# Altium PCB 底板20160428.PcbDoc (part 1 of 5)
Units mm, origin at the board's own origin, x right, y up, seen from the top; angles counter-clockwise.
Board outline 123.5 x 102.51 mm, 2 copper layers (Top Layer, Bottom Layer); 219 components, 217 nets, 791 pads, 260 vias.
Unrouted connection lines stored in the file: 1.
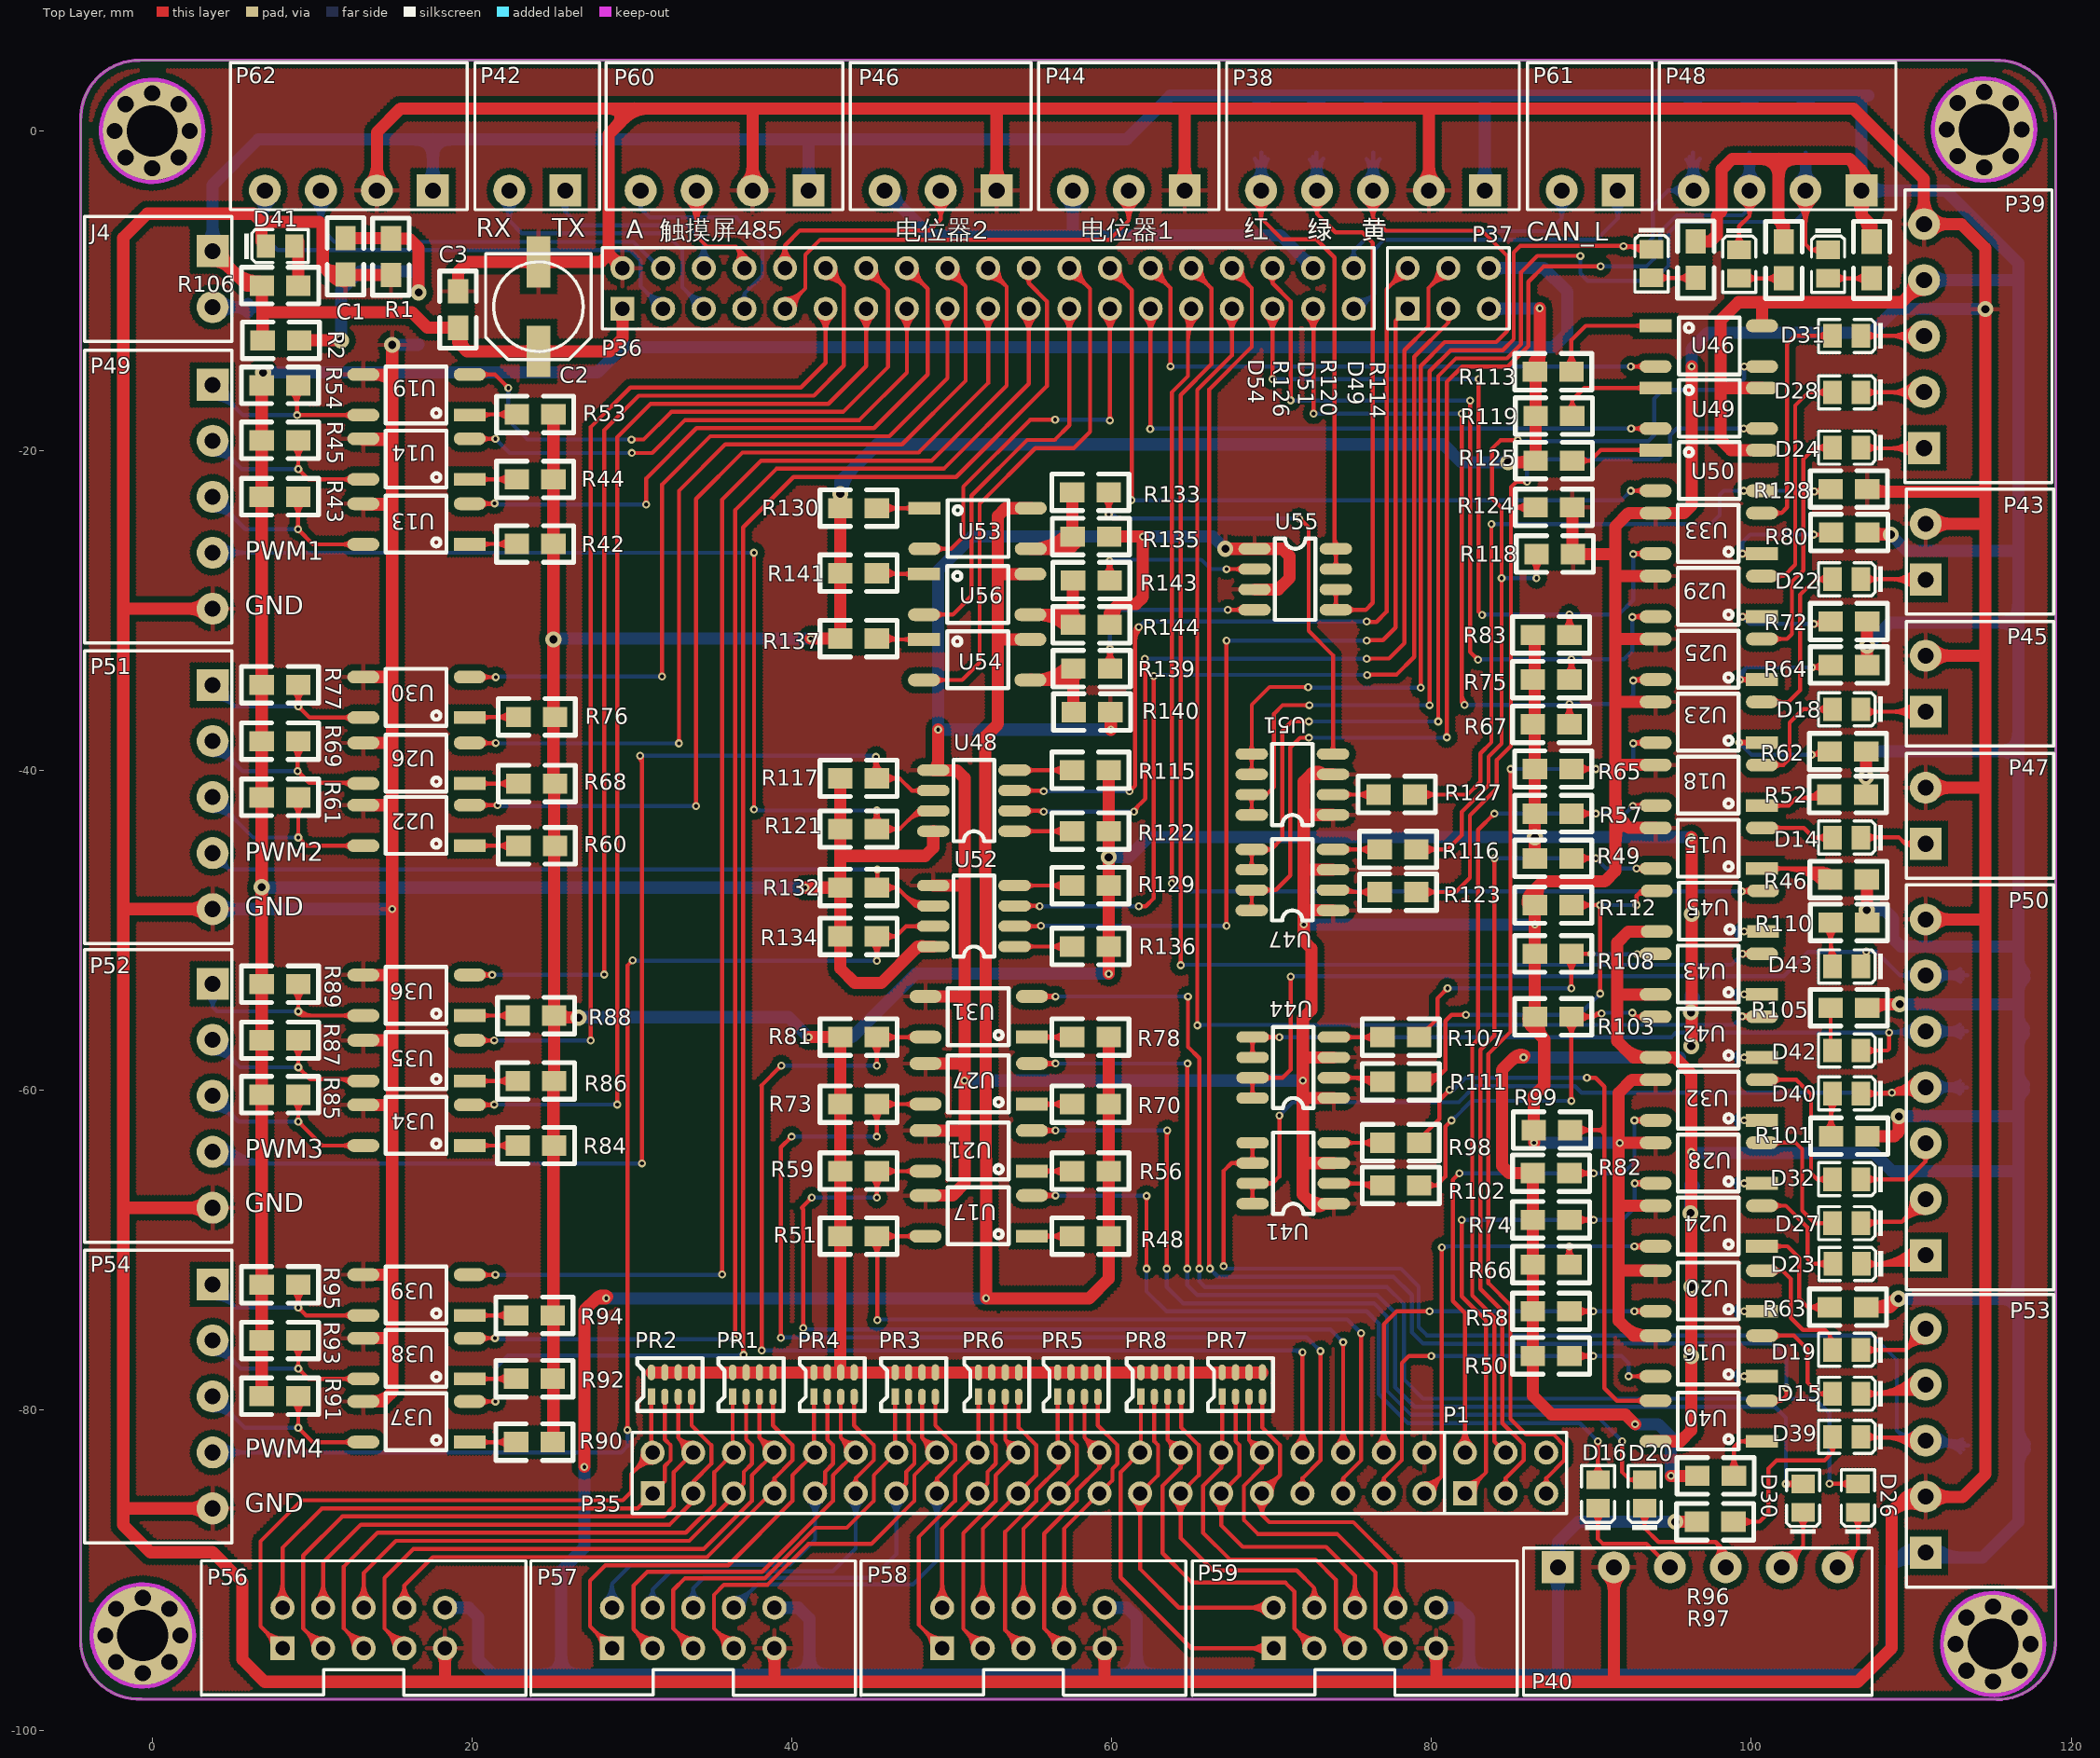
[diagram p0: Top Layer view]
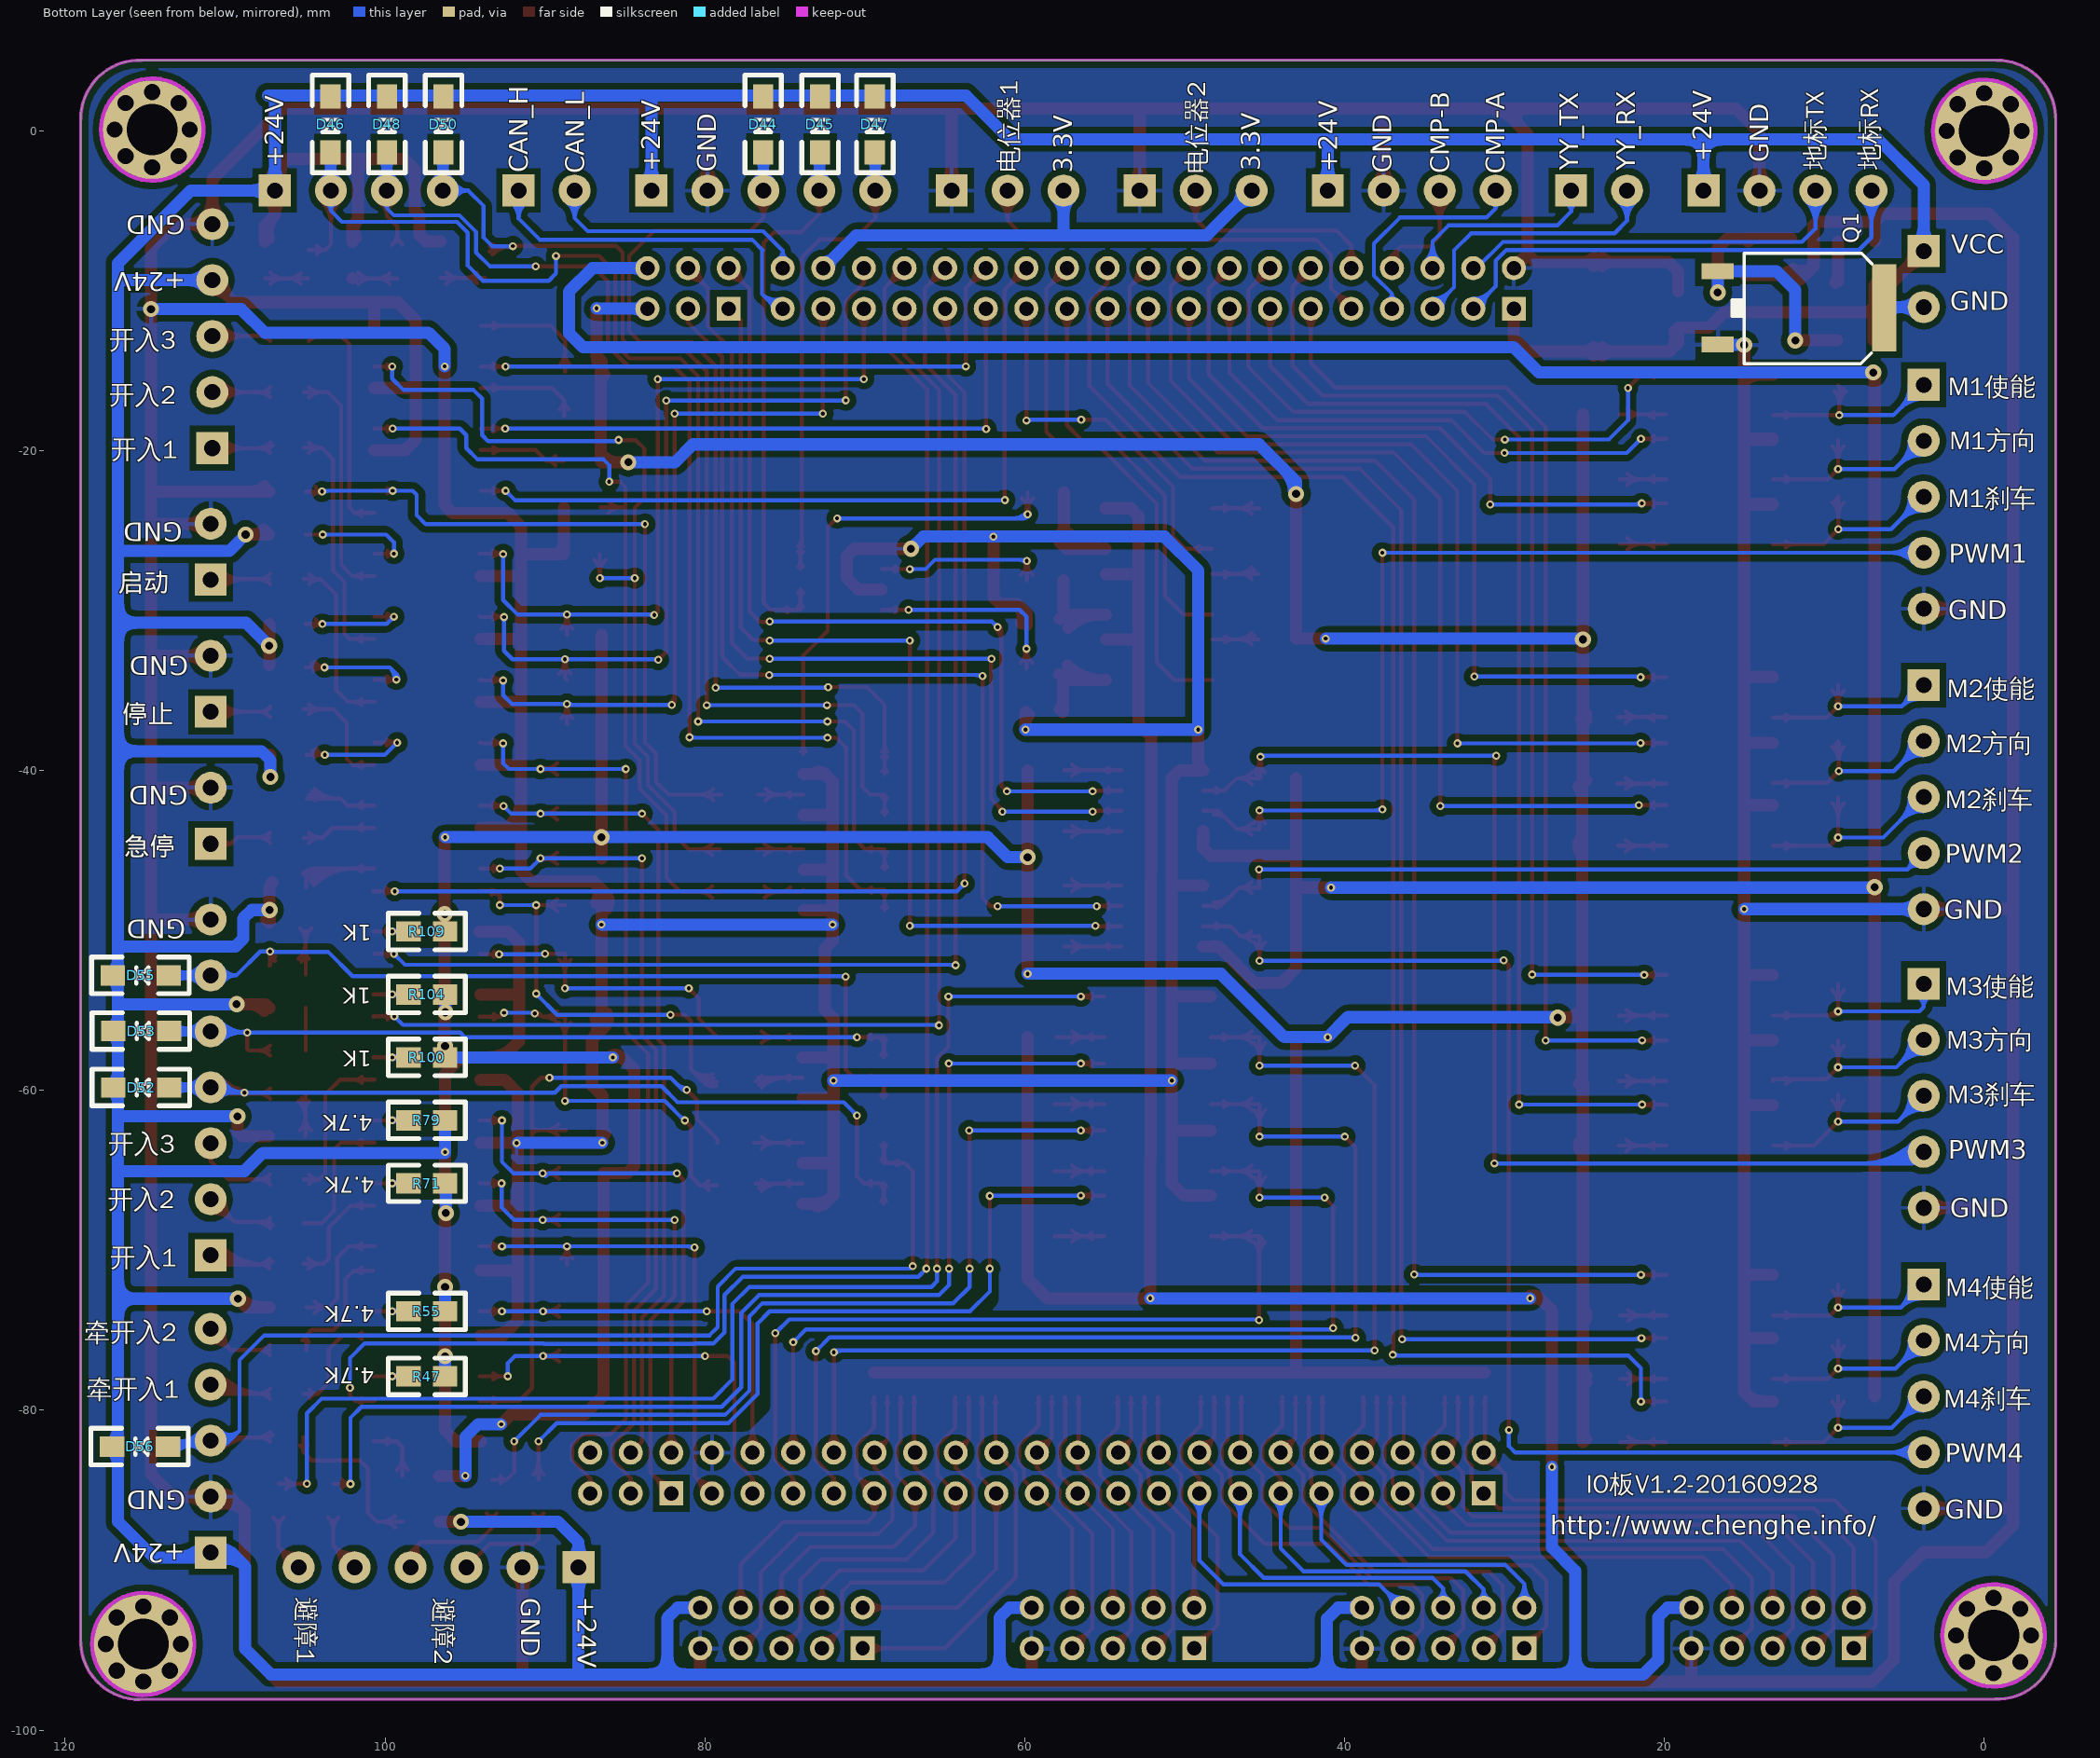
[diagram p1: Bottom Layer view, seen from below]

## Layer stack, top to bottom
Top Layer: signal copper 0.0356
Dielectric: dielectric 0.32, FR-4, Dk 4.8
Bottom Layer: signal copper 0.0356

## Board outline
-4.47,-94.389 -4.47,0.61 cw(c-0.792,0.731) -0.792,4.412 -0.792,4.42 115.222,4.42 115.222,4.415 cw(c115.344,0.737) 119.024,0.737 119.03,0.737 119.03,-94.285 cw(c115.351,-94.406) 115.351,-98.087 115.351,-98.08 -0.669,-98.069 -0.669,-98.067 cw(c-0.79,-94.389)

## Design rules (kind name [scope] priority, off if disabled: settings)
Clearance [All] p1: gap=0.4
HoleToHoleClearance [All] p1: gap=0.152 allowstackedmicrovias=TRUE
MinimumSolderMaskSliver [All] p1: minsoldermaskwidth=0.051
PolygonConnect [All] p1: connectstyle=Relief reliefconductorwidth=0.254 reliefentries=4 polygonreliefangle="90 Angle"
RoutingVias [All] p1: holewidth=0.711 width=1.27 viastyle="Through Hole" minholewidth=0.711 minwidth=1.27 maxholewidth=0.711 maxwidth=1.27
SilkToSilkClearance [All] p1: silktosilkclearance=-1
SilkscreenOverComponentPads [IsPad] p1: minsilkscreentomaskgap=-1
SolderMaskExpansion [All] p1: expansion=0.102
Width [All] p1: maxlimit=1.27 minlimit=0.254 preferedwidth=0.254
24 further rules are at their usual default settings.

## Components (designator, comment, footprint, x,y, rotation, side; value= is the part's Value field where it differs from the comment)
C1 "0.1uF" 0805 12.09,-8.992 r90 top
C2 "220uF" CC6.56.5 24.155,-10.998 r90 top
C3 "0.1uF" 0805 19.126,-10.033 r270 top
D14 "LED0" LC-0805_LED_S1 105.08,-44.196 r180 top
D15 "LED0" LC-0805_LED_S1 105.08,-78.969 r180 top
D16 "LED0" LC-0805_LED_S1 90.405,-84.346 r90 top
D18 "LED0" LC-0805_LED_S1 105.08,-36.17 r180 top
D19 "LED0" LC-0805_LED_S1 105.08,-76.225 r180 top
D20 "LED0" LC-0805_LED_S1 93.326,-84.346 r90 top
D22 "LED0" LC-0805_LED_S1 105.08,-28.035 r180 top
D23 "LED0" LC-0805_LED_S1 105.105,-70.841 r180 top
D24 "LED0" LC-0805_LED_S1 105.08,-19.812 r180 top
D26 "LED0" LC-0805_LED_S1 103.232,-84.6 r90 top
D27 "LED0" LC-0805_LED_S1 105.08,-68.301 r180 top
D28 "LED0" LC-0805_LED_S1 105.08,-16.351 r180 top
D30 "LED0" LC-0805_LED_S1 106.661,-84.6 r90 top
D31 "LED0" LC-0805_LED_S1 105.08,-12.82 r180 top
D32 "LED0" LC-0805_LED_S1 105.08,-65.557 r180 top
D39 "LED0" LC-0805_LED_S1 105.08,-81.661 r180 top
D40 "LED0" LC-0805_LED_S1 105.08,-60.198 r180 top
D41 "LED0" LC-0805_LED_S1 8.89,-7.214 r0 top
D42 "LED0" LC-0805_LED_S1 105.08,-57.506 r180 top
D43 "LED0" LC-0805_LED_S1 105.08,-52.248 r180 top
D44 "" DIDOE 76.352,-1.346 r90 bottom
D45 "" DIDOE 72.796,-1.346 r90 bottom
D46 "" DIDOE 103.403,-1.346 r90 bottom
D47 "" DIDOE 69.367,-1.346 r90 bottom
D48 "" DIDOE 99.873,-1.346 r90 bottom
D49 "LED0" LC-0805_LED_S1 104.794,-9.228 r270 top
D50 "" DIDOE 96.342,-1.346 r90 bottom
D51 "LED0" LC-0805_LED_S1 99.231,-9.228 r270 top
D52 "" DIDOE 113.487,-59.817 r0 bottom
D53 "" DIDOE 113.487,-56.286 r0 bottom
D54 "LED0" LC-0805_LED_S1 93.751,-9.195 r270 top
D55 "" DIDOE 113.513,-52.807 r0 bottom
D56 "" DIDOE 113.563,-82.271 r0 bottom
J4 "CON2" DZ-2-3.5 3.785,-7.518 r270 top locked
P1 "Header 3X2H" HDR2X3 82.093,-85.192 r0 top locked
P35 "MHDR2X20" DIP-2X20 31.293,-85.192 r0 top locked
P36 "MHDR2X19" DIP-2X19 29.413,-11.125 r0 top locked
P37 "Header 3X2H" HDR2X3 78.511,-11.125 r0 top
P38 "三色灯" DZ-5-3.5 83.337,-3.734 r180 top
P39 "输入备用" DZ-5-3.5 110.795,-19.837 r90 top
P40 "蔽障" DZ-6-3.5 87.9,-89.814 r0 top
P42 "语音板通信" DZ-2-3.5 25.832,-3.734 r180 top
P43 "启动" DZ-2-3.5 110.896,-28.067 r90 top
P44 "电位器1" DZ-3-3.5 64.567,-3.734 r180 top
P45 "停止" DZ-2-3.5 110.896,-36.322 r90 top
P46 "电位器2" DZ-3-3.5 52.807,-3.734 r180 top
P47 "急停" DZ-2-3.5 110.896,-44.577 r90 top
P48 "三色灯" DZ-4-3.5 106.883,-3.734 r180 top
P49 "电机1" DZ-5-3.5 3.785,-15.883 r270 top
P50 "通讯IO" DZ-7-3.5 110.896,-70.307 r90 top
P51 "电机2" DZ-5-3.5 3.785,-34.662 r270 top
P52 "电机3" DZ-5-3.5 3.785,-53.339 r270 top
P53 "牵引杆" DZ-5-3.5 110.896,-88.9 r90 top
P54 "电机4" DZ-5-3.5 3.785,-72.136 r270 top
P56 "磁导航1" HDR2X5 8.153,-94.884 r0 top
P57 "磁导航2" HDR2X5 28.753,-94.884 r0 top locked
P58 "磁导航3" HDR2X5 49.403,-94.884 r0 top
P59 "磁导航4" HDR2X5 70.129,-94.884 r0 top
P60 "触摸屏RS485" DZ-4-3.5 41.046,-3.734 r180 top
P61 "应用板通讯" DZ-2-3.5 91.643,-3.734 r180 top
P62 "RFID_RS232" DZ-4-3.5 17.551,-3.734 r180 top
PR1 "PZ" SOP8 36.297,-79.019 r90 top
PR2 "PZ" SOP8 31.217,-79.019 r90 top
PR3 "PZ" SOP8 46.457,-79.019 r90 top
PR4 "PZ" SOP8 41.377,-79.019 r90 top
PR5 "PZ" SOP8 56.617,-79.019 r90 top
PR6 "PZ" SOP8 51.664,-79.019 r90 top
PR7 "PZ" SOP8 66.904,-79.019 r90 top
PR8 "PZ" SOP8 61.824,-79.019 r90 top
Q1 "IRFR1205" TO-252AA 16.662,-8.788 r270 bottom
R1 "1k" 0805 14.935,-6.731 r270 top
R2 "2k" 0805 9.195,-13.106 r180 top
R42 "1K" 0805 22.809,-25.832 r0 top
R43 "4.7K" 0805 9.136,-22.879 r180 top
R44 "1K" 0805 22.809,-21.793 r0 top
R45 "4.7K" 0805 9.136,-19.355 r180 top
R46 "4.7K" 0805 104.927,-46.812 r0 top
R47 "4.7K" 0805 98.527,-77.876 r180 bottom
R48 "4.7K" 0805 57.531,-69.113 r0 top
R49 "1K" 0805 88.748,-45.491 r180 top
R50 "1K" 0805 88.621,-76.606 r180 top
R51 "1K" 0805 45.314,-69.113 r180 top
R52 "4.7K" 0805 104.877,-41.504 r0 top
R53 "1K" 0805 22.809,-17.729 r0 top
R54 "4.7K" 0805 9.136,-15.919 r180 top
R55 "4.7K" 0805 98.527,-73.812 r180 bottom
R56 "4.7K" 0805 57.531,-65.049 r0 top
R57 "1K" 0805 88.748,-42.697 r180 top
R58 "1K" 0805 88.621,-73.812 r180 top
R59 "1K" 0805 45.314,-65.049 r180 top
R60 "1K" 0805 22.911,-44.704 r0 top
R61 "4.7K" 0805 9.136,-41.675 r180 top
R62 "4.7K" 0805 104.902,-38.811 r0 top
R63 "4.7K" 0805 104.902,-73.558 r0 top
R64 "4.7K" 0805 104.953,-33.401 r0 top
R65 "1K" 0805 88.748,-39.903 r180 top
R66 "1K" 0805 88.621,-70.891 r180 top
R67 "1K" 0805 88.621,-37.109 r180 top
R68 "1K" 0805 22.911,-40.818 r0 top
R69 "4.7K" 0805 9.136,-38.169 r180 top
R70 "4.7K" 0805 57.531,-60.858 r0 top
R71 "4.7K" 0805 98.527,-65.811 r180 bottom
R72 "4.7K" 0805 104.953,-30.683 r0 top
R73 "1K" 0805 45.314,-60.858 r180 top
R74 "1K" 0805 88.621,-68.097 r180 top
R75 "1K" 0805 88.621,-34.315 r180 top
R76 "1K" 0805 22.911,-36.652 r0 top
R77 "4.7K" 0805 9.136,-34.639 r180 top
R78 "4.7K" 0805 57.531,-56.667 r0 top
R79 "4.7K" 0805 98.527,-61.874 r180 bottom
R80 "4.7K" 0805 104.978,-25.121 r0 top
R81 "1K" 0805 45.314,-56.667 r180 top
R82 "1K" 0805 88.621,-65.176 r180 top
R83 "1K" 0805 88.621,-31.521 r180 top
R84 "1K" 0805 22.86,-63.449 r0 top
R85 "4.7K" 0805 9.136,-60.267 r180 top
R86 "1K" 0805 22.86,-59.411 r0 top
R87 "4.7K" 0805 9.136,-56.864 r180 top
R88 "1K" 0805 22.86,-55.321 r0 top
R89 "4.7K" 0805 9.136,-53.359 r180 top
R90 "1K" 0805 22.758,-81.991 r0 top
R91 "4.7K" 0805 9.136,-79.114 r180 top
R92 "1K" 0805 22.758,-78.029 r0 top
R93 "4.7K" 0805 9.136,-75.634 r180 top
R94 "1K" 0805 22.758,-74.066 r0 top
R95 "4.7K" 0805 9.136,-72.155 r180 top
R96 "1K" 0805 98.908,-84.099 r180 top
R97 "4.7K" 0805 96.596,-86.97 r0 top
R98 "1K" 0805 76.937,-63.271 r0 top
R99 "4.7K" 0805 86.385,-62.484 r0 top
R100 "1K" 0805 98.527,-57.937 r180 bottom
R101 "4.7K" 0805 104.978,-62.865 r0 top
R102 "1K" 0805 76.937,-65.938 r0 top
R103 "4.7K" 0805 86.462,-55.397 r0 top
R104 "1K" 0805 98.527,-54 r180 bottom
R105 "4.7K" 0805 107.239,-54.839 r180 top
R106 "4.7K" 0805 6.858,-9.677 r0 top
R107 "1K" 0805 76.937,-56.667 r0 top
R108 "4.7K" 0805 86.462,-51.46 r0 top
R109 "1K" 0805 98.527,-50.063 r180 bottom
R110 "4.7K" 0805 104.953,-49.505 r0 top
R111 "1K" 0805 76.937,-59.461 r0 top
R112 "4.7K" 0805 86.462,-48.412 r0 top
R113 "1K" 0805 88.748,-15.062 r180 top
R114 "4.7K" 0805 107.518,-6.934 r270 top
R115 "330R" 0805 57.531,-39.98 r0 top
R116 "1K" 0805 76.759,-44.933 r0 top
R117 "2K" 0805 45.314,-40.488 r180 top
R118 "4.7K" 0805 88.849,-26.467 r180 top
R119 "1K" 0805 88.798,-17.831 r180 top
R120 "4.7K" 0805 102.032,-9.22 r90 top
R121 "2K" 0805 43.028,-43.663 r0 top
R122 "330R" 0805 57.531,-43.79 r0 top
R123 "1K" 0805 76.759,-47.6 r0 top
R124 "4.7K" 0805 88.798,-23.546 r180 top
R125 "1K" 0805 88.798,-20.625 r180 top
R126 "4.7K" 0805 96.52,-9.195 r90 top
R127 "1K" 0805 76.683,-41.504 r0 top
R128 "4.7K" 0805 107.239,-22.403 r180 top
R129 "330R" 0805 57.531,-47.193 r0 top
R130 "1K" 0805 45.314,-23.597 r180 top
R132 "2K" 0805 45.314,-47.32 r180 top
R133 "1K" 0805 59.817,-22.606 r180 top
R134 "2K" 0805 43.028,-50.368 r0 top
R135 "4.7K" 0805 59.842,-25.375 r180 top
R136 "330R" 0805 57.531,-51.003 r0 top
R137 "1K" 0805 45.314,-31.75 r180 top
R139 "1K" 0805 59.893,-33.63 r180 top
R140 "4.7K" 0805 59.919,-36.347 r180 top
R141 "1K" 0805 45.314,-27.661 r180 top
R143 "1K" 0805 59.868,-28.118 r180 top
R144 "4.7K" 0805 59.868,-30.886 r180 top
U13 "TLP185" TLP127 20.447,-25.857 r180 top
U14 "TLP185" TLP127 20.447,-21.793 r180 top
U15 "TLP185" TLP127 101.249,-46.126 r180 top
U16 "TLP185" TLP127 101.249,-77.876 r180 top
U17 "TLP185" TLP127 55.601,-69.113 r180 top
U18 "TLP185" TLP127 101.249,-42.189 r180 top
U19 "TLP185" TLP127 20.447,-17.78 r180 top
U20 "TLP185" TLP127 101.249,-73.812 r180 top
U21 "TLP185" TLP127 55.601,-65.049 r180 top
U22 "TLP185" TLP127 20.447,-44.704 r180 top
U23 "TLP185" TLP127 101.249,-38.252 r180 top
U24 "TLP185" TLP127 101.249,-69.748 r180 top
U25 "TLP185" TLP127 101.249,-34.315 r180 top
U26 "TLP185" TLP127 20.447,-40.811 r180 top
U27 "TLP185" TLP127 55.601,-60.858 r180 top
U28 "TLP185" TLP127 101.249,-65.811 r180 top
U29 "TLP185" TLP127 101.249,-30.378 r180 top
U30 "TLP185" TLP127 20.447,-36.691 r180 top
U31 "TLP185" TLP127 55.601,-56.667 r180 top
U32 "TLP185" TLP127 101.249,-61.874 r180 top
U33 "TLP185" TLP127 101.249,-26.441 r180 top
U34 "TLP185" TLP127 20.447,-63.449 r180 top
U35 "TLP185" TLP127 20.447,-59.411 r180 top
U36 "TLP185" TLP127 20.447,-55.321 r180 top
U37 "TLP185" TLP127 20.447,-81.991 r180 top
U38 "TLP185" TLP127 20.447,-78.033 r180 top
U39 "TLP185" TLP127 20.447,-74.066 r180 top
U40 "TLP185" TLP127 101.249,-81.94 r180 top
U41 "AF4920GW" SO-8 73.889,-67.081 r180 top
U42 "TLP185" TLP127 101.249,-57.937 r180 top
U43 "TLP185" TLP127 101.249,-54 r180 top
U44 "AF4920GW" SO-8 73.889,-60.477 r180 top
U45 "TLP185" TLP127 101.321,-50.063 r180 top
U46 "TLP185" TLP127 93.421,-12.192 r0 top
U47 "AF4920GW" SO-8 73.838,-48.743 r180 top
U48 "HCPL0630" SO-8 53.924,-43.79 r180 top
U49 "TLP185" TLP127 93.421,-16.078 r0 top
U50 "TLP185" TLP127 93.421,-19.964 r0 top
U51 "AF4920GW" SO-8 73.838,-42.774 r180 top
U52 "HCPL0630" SO-8 53.924,-51.003 r180 top
U53 "TLP185" TLP127 47.701,-23.597 r0 top
U54 "TLP185" TLP127 47.676,-31.801 r0 top
U55 "AF4920GW" SO-8 68.936,-26.137 r0 top
U56 "TLP185" TLP127 47.676,-27.711 r0 top

## Footprints (in the part's own frame and the unit in brackets; to place one, negate y for a bottom-side part, rotate by r counter-clockwise, add the part's x,y. Pads: shape width x height; smd on the part's side, far side on the other; paste and mask are expansions set on the pad)
0805 [mil]
  rect 60x50 smd: 1(0,0) 2(90,0)
  silkscreen extent -50,-45 140,45
CC6.56.5 [mm]
  rect 3.2x1.5 smd: 1(-2.794,0) 2(2.8,0)
  silkscreen extent -3.3,-3.3 3.3,3.3
DIDOE [mil]
  rect 60x50 smd: 1(0,0) 2(137.8,0)
  silkscreen extent -50,-45 190,45
DIP-2X19 [mm]
  rect 1.5x1.5 hole 0.9: 1(0,0)
  round 1.5 hole 0.9: 2(0,2.54) 3(2.54,0) 4(2.54,2.54) 5(5.08,0) 6(5.08,2.54) 7(7.62,0) 8(7.62,2.54) 9(10.16,0) 10(10.16,2.54) 11(12.7,0) 12(12.7,2.54) 13(15.24,0) 14(15.24,2.54) 15(17.78,0) 16(17.78,2.54) 17(20.32,0) 18(20.32,2.54) 19(22.86,0) 20(22.86,2.54) 21(25.4,0) 22(25.4,2.54) 23(27.94,0) 24(27.94,2.54) 25(30.48,0) 26(30.48,2.54) 27(33.02,0) 28(33.02,2.54) 29(35.56,0) 30(35.56,2.54) 31(38.1,0) 32(38.1,2.54) 33(40.64,0) 34(40.64,2.54) 35(43.18,0) 36(43.18,2.54) 37(45.72,0) 38(45.72,2.54)
  silkscreen extent -1.27,-1.27 46.99,3.81
DIP-2X20 [mm]
  rect 1.5x1.5 hole 0.9: 1(0,0)
  round 1.5 hole 0.9: 2(0,2.54) 3(2.54,0) 4(2.54,2.54) 5(5.08,0) 6(5.08,2.54) 7(7.62,0) 8(7.62,2.54) 9(10.16,0) 10(10.16,2.54) 11(12.7,0) 12(12.7,2.54) 13(15.24,0) 14(15.24,2.54) 15(17.78,0) 16(17.78,2.54) 17(20.32,0) 18(20.32,2.54) 19(22.86,0) 20(22.86,2.54) 21(25.4,0) 22(25.4,2.54) 23(27.94,0) 24(27.94,2.54) 25(30.48,0) 26(30.48,2.54) 27(33.02,0) 28(33.02,2.54) 29(35.56,0) 30(35.56,2.54) 31(38.1,0) 32(38.1,2.54) 33(40.64,0) 34(40.64,2.54) 35(43.18,0) 36(43.18,2.54) 37(45.72,0) 38(45.72,2.54) 39(48.26,0) 40(48.26,2.54)
  silkscreen extent -1.27,-1.27 49.53,3.81
DZ-2-3.5 [mm]
  rect 2x2 hole 1: 1(0,0)
  round 2 hole 1: 2(3.5,0)
  silkscreen extent -2.15,-8 5.65,1.2
DZ-3-3.5 [mm]
  rect 2x2 hole 1: 1(0,0)
  round 2 hole 1: 2(3.5,0) 3(7,0)
  silkscreen extent -2.15,-8 9.15,1.2
DZ-4-3.5 [mm]
  rect 2x2 hole 1: 1(0,0)
  round 2 hole 1: 2(3.5,0) 3(7,0) 4(10.5,0)
  silkscreen extent -2.15,-8 12.65,1.2
DZ-5-3.5 [mm]
  rect 2x2 hole 1: 1(0,0)
  round 2 hole 1: 2(3.5,0) 3(7,0) 4(10.5,0) 5(14,0)
  silkscreen extent -2.15,-8 16.15,1.2
DZ-6-3.5 [mm]
  rect 2x2 hole 1: 1(0,0)
  round 2 hole 1: 2(3.5,0) 3(7,0) 4(10.5,0) 5(14,0) 6(17.5,0)
  silkscreen extent -2.15,-8 19.65,1.2
DZ-7-3.5 [mm]
  rect 2x2 hole 1: 1(0,0)
  round 2 hole 1: 2(3.5,0) 3(7,0) 4(10.5,0) 5(14,0) 6(17.5,0) 7(21,0)
  silkscreen extent -2.15,-8 23.15,1.2
HDR2X3 [mm]
  rect 1.5x1.5 hole 0.9: 1(0,0)
  round 1.5 hole 0.9: 2(0,2.54) 3(2.54,0) 4(2.54,2.54) 5(5.08,0) 6(5.08,2.54)
  silkscreen extent -1.27,-1.27 6.35,3.81
HDR2X5 [mm]
  rect 1.5x1.5 hole 0.9: 1(0,0)
  round 1.5 hole 0.9: 2(0,2.54) 3(2.54,0) 4(2.54,2.54) 5(5.08,0) 6(5.08,2.54) 7(7.62,0) 8(7.62,2.54) 9(10.16,0) 10(10.16,2.54)
  silkscreen extent -5.07,-2.93 15.23,5.47
LC-0805_LED_S1 [mm]
  rect 1.16x1.47 smd: A(0.001,0) K(-1.779,0)
  silkscreen extent -3.13,-1.04 0.88,1.03, body extent -1.9,-0.62 0.12,0.62, height 1.1
SO-8 [mil]
  oval 80x28 smd: 1(0,0) 2(0,-50) 3(0,-100) 4(0,-150) 5(200,-150) 6(200,-100) 7(200,-50) 8(200,0)
  silkscreen extent 50,-175 150,25
SOP8 [mil]
  rect 40x18 smd: 1(-5.35,-0.18)
  oval 40x18 smd: 2(-5.35,-33.18) 3(-5.35,-66.18) 4(-5.35,-99.18) 5(54.65,-99.18) 6(54.65,-66.18) 7(54.65,-33.18)
  oval 39x18 smd: 8(54.65,-0.18)
  silkscreen extent -40,-126 90,35
TLP127 [mm]
  rect 2x0.8 smd: 1(0.589,-0.001)
  oval 2x0.8 smd: 3(0.589,-2.541) 4(7.239,-2.541) 6(7.239,-0.001)
  silkscreen extent 2.04,-3.05 5.85,0.51
TO-252AA [mm]
  rect 1x2 smd: 1(0,0) 3(4.57,0)
  rect 5.46x1.5 smd: 2(2.286,10.414)
  silkscreen extent -1.12,0.89 5.77,9.65

## Part data
D44 D45 D46 D47 D48 D50 D52 D53 D55 D56: library part DIO
J4: "Co"
P1 P37: "Header, 3-Pin, Dual row, Rig"
P35: "Header, 20-Pin,"
P36: "Header, 19-Pin,"
P38 P39 P49 P51 P52 P53 P54: library part "Header 5", "Heade"
P40: library part He
P42 P43 P45 P47 P61: library part "Header 2", "Heade"
P44 P46: library part "Header 3", "Heade"
P48 P60 P62: library part "Header 4", "Heade"
P50: library part "Header 7", "Heade"
P56 P57 P58 P59: library part "Header 5X2H", "Header, 5-Pin, Dual row, Right Angl"
Q1: library part NMOS-2, "N-Channel Powe"
U48 U52: library part H

## Free pads (board coordinates)
  round 1 hole 1: 1(-2.934,-94.082) 1(-2.35,0) 1(-2.246,-95.743) 1(-2.246,-92.42) 1(-1.662,-1.662) 1(-1.662,1.662) 1(-0.584,-96.432) 1(-0.584,-91.732) 1(0,-2.35) 1(0,2.35) 1(1.078,-95.743) 1(1.078,-92.42) 1(1.662,-1.662) 1(1.662,1.662) 1(1.766,-94.082) 1(2.35,0) 1(112.204,0.076) 1(112.763,-94.615) 1(112.892,-1.586) 1(112.892,1.738) 1(113.451,-96.277) 1(113.451,-92.953) 1(114.554,-2.274) 1(114.554,2.426) 1(115.113,-96.965) 1(115.113,-92.265) 1(116.216,-1.586) 1(116.216,1.738) 1(116.775,-96.277) 1(116.775,-92.953) 1(116.904,0.076) 1(117.463,-94.615)
  round 6.2 hole 3.2: 1(-0.584,-94.082) 1(0,0) 1(114.554,0.076) 1(115.113,-94.615)

## Via types
v1: diameter 0.5, hole 0.25, Top Layer to Bottom Layer, 233 vias
v2: diameter 1, hole 0.5, Top Layer to Bottom Layer, 27 vias

## Nets (pads, with @x,y where several pads share a name; then routed paths per layer and width w, separated by ;. In a path a pad name is that pad's centre, name@x,y a point inside that pad or via, vN(x,y) a via of type N, cw(c..) or ccw(c..) an arc to the next point about the centre after c; other vN are vias at no path point)
BY_KC1: P36.25 U53.3 | length 30.3
  Top Layer w0.254: U53.3@48.29,-26.138 49.961,-26.138 50.724,-25.375 50.724,-22.25 54.915,-18.059 v1(56.464,-18.059) ; U53.3@49.083,-26.331 cw(c49.549,-26.797) 49.549,-26.138 cw(c49.549,-25.479) U53.3@49.083,-25.945 ; v1@56.377,-18.146 ccw(c56.167,-18.356) 56.167,-18.059 ccw(c56.167,-17.762) v1@56.377,-17.972 ; P36.25@59.453,-11.566 cw(c58.389,-12.629) 59.893,-12.629 cw(c61.397,-12.629) P36.25@60.334,-11.566 ; P36.25@59.632,-11.386 cw(c59.002,-12.016) 59.893,-12.016 cw(c60.784,-12.016) P36.25@60.154,-11.386 ; v1@59.806,-18.023 ccw(c59.596,-17.813) 59.893,-17.813 ccw(c60.19,-17.813) v1@59.98,-18.023 ; v1@59.893,-18.085 P36.25@59.893,-11.125
  Bottom Layer w0.254: v1(56.464,-18.059) 59.842,-18.059 v1(59.893,-18.11) ; v1@56.551,-18.146 cw(c56.761,-18.356) 56.761,-18.059 cw(c56.761,-17.762) v1@56.551,-17.972 ; 59.474,-18.059 cw(c59.474,-18.53) v1@59.806,-18.197
BY_KC2: P36.24 U54.3 | length 38.2
  Top Layer w0.254: U54.3@48.265,-34.342 50.647,-34.342 51.74,-33.249 51.74,-23.317 55.22,-19.837 57.633,-19.837 58.649,-18.821 58.649,-9.881 P36.24@57.353,-8.585 ; U54.3@49.058,-34.535 cw(c49.524,-35.001) 49.524,-34.342 cw(c49.524,-33.683) U54.3@49.058,-34.149 ; P36.24@57.353,-9.208 cw(c57.353,-10.712) 58.417,-9.649 cw(c59.48,-8.585) P36.24@57.976,-8.585 ; P36.24@57.353,-8.954 cw(c57.353,-9.845) 57.983,-9.215 cw(c58.613,-8.585) P36.24@57.722,-8.585
BY_KC3: P36.23 U56.3 | length 29.8
  Top Layer w0.254: U56.3@48.265,-30.252 50.062,-30.252 51.232,-29.083 51.232,-22.809 54.712,-19.329 56.439,-19.329 57.353,-18.415 P36.23@57.353,-11.125 ; U56.3@49.058,-30.445 cw(c49.524,-30.911) 49.524,-30.252 cw(c49.524,-29.593) U56.3@49.058,-30.059 ; P36.23@56.913,-11.566 cw(c55.849,-12.629) 57.353,-12.629 cw(c58.857,-12.629) P36.23@57.794,-11.566 ; P36.23@57.092,-11.386 cw(c56.462,-12.016) 57.353,-12.016 cw(c58.244,-12.016) P36.23@57.614,-11.386
BY_KC11: D44.1 P38.3 U51.5 U51.6 | length 78.8
  Top Layer w0.254: U51.6@68.596,-40.072 ccw(c68.206,-39.682) 68.758,-39.682 ccw(c69.31,-39.682) U51.6@68.919,-40.072 ; U51.5@68.596,-39.125 cw(c68.206,-39.515) 68.758,-39.515 cw(c69.31,-39.515) U51.5@68.919,-39.125 ; U51.5@68.596,-38.802 ccw(c68.206,-38.412) 68.758,-38.412 ccw(c69.31,-38.412) U51.5@68.919,-38.802 ; U51.6@68.758,-40.234 U51.5@68.758,-38.964 68.758,-35.89 69.875,-34.773 v1@72.314,-34.773 ; 71.93,-34.773 cw(c71.93,-35.156) v1@72.201,-34.885 ; P38.3@75.825,-4.44 cw(c75.095,-5.446) 76.337,-5.446 ; P38.3@75.974,-4.235 cw(c75.457,-4.948) 76.337,-4.948 cw(c77.218,-4.948) P38.3@76.701,-4.235 ; P38.3@76.337,-3.734 76.337,-5.446 ; P38.3@76.85,-4.44 ccw(c77.58,-5.446) 76.337,-5.446 ; v1(79.324,-34.823) 79.324,-14.707 80.816,-13.214 84.042,-13.214 84.734,-12.522 84.734,-7.823 83.16,-6.248 77.14,-6.248 76.337,-5.446
  Bottom Layer w0.254: v1(72.288,-34.798) 72.314,-34.823 v1(79.324,-34.823) ; v1@72.375,-34.711 ccw(c72.647,-34.44) 72.647,-34.823 ; P38.3@75.72,-3.116 ccw(c74.194,-1.59) D44.1@76.352,-1.59 ; P38.3@75.9,-3.296 ccw(c74.807,-2.203) 76.352,-2.203 ; D44.1@75.932,-1.758 cw(c75.063,-2.347) 76.077,-2.619 ; D44.1@75.993,-1.832 cw(c75.126,-2.7) 76.352,-2.7 cw(c77.579,-2.7) D44.1@76.712,-1.832 ; 76.083,-2.595 cw(c77.168,-2.886) D44.1@76.606,-1.913 ; D44.1@76.098,-1.913 cw(c75.569,-2.83) 76.592,-2.556 ; P38.3@76.352,-3.719 D44.1@76.352,-1.346 ; 76.352,-2.276 ccw(c77.796,-2.276) P38.3@76.775,-3.296 ; D44.1@76.352,-1.662 ccw(c78.409,-1.662) P38.3@76.955,-3.116 ; 76.606,-2.609 cw(c77.556,-2.354) D44.1@76.762,-1.773 ; v1@79.237,-34.91 ccw(c79.027,-35.12) 79.027,-34.823 ccw(c79.027,-34.526) v1@79.237,-34.736
BY_KC22: D45.1 P38.4 U55.5 U55.6 | length 51.4
  Top Layer w0.254: P38.4@72.423,-4.502 cw(c72.047,-5.197) 72.837,-5.197 ; P38.4@72.543,-4.279 cw(c72.277,-4.771) 72.837,-4.771 cw(c73.398,-4.771) P38.4@73.131,-4.279 ; P38.4@72.837,-3.734 72.837,-5.197 ; P38.4@73.252,-4.502 ccw(c73.627,-5.197) 72.837,-5.197 ; U55.5@73.854,-29.785 ccw(c73.464,-29.395) 74.016,-29.395 ccw(c74.567,-29.395) U55.5@74.177,-29.785 ; U55.6@73.854,-28.838 cw(c73.464,-29.228) 74.016,-29.228 cw(c74.567,-29.228) U55.6@74.177,-28.838 ; U55.6@74.016,-28.677 U55.5@74.016,-29.947 75.895,-29.947 76.327,-29.515 76.327,-7.01 75.667,-6.35 73.99,-6.35 72.837,-5.197 ; U55.5@74.838,-30.108 cw(c75.228,-30.498) 75.228,-29.947 cw(c75.228,-29.395) U55.5@74.838,-29.785
  Bottom Layer w0.254: P38.4@72.22,-3.116 ccw(c70.829,-1.725) D45.1@72.796,-1.725 ; D45.1@72.396,-1.786 cw(c71.664,-2.359) 72.562,-2.6 ; P38.4@72.4,-3.296 ccw(c71.442,-2.338) 72.796,-2.338 ; D45.1@72.437,-1.832 cw(c71.57,-2.7) 72.796,-2.7 cw(c74.023,-2.7) D45.1@73.156,-1.832 ; D45.1@72.543,-1.913 cw(c71.956,-2.932) 73.091,-2.628 cw(c74.166,-2.34) D45.1@73.226,-1.745 ; 72.583,-2.523 cw(c73.552,-2.782) D45.1@73.05,-1.913 ; D45.1@72.596,-1.63 cw(c72.166,-1.967) D45.1@72.694,-2.108 ; P38.4@72.796,-3.693 D45.1@72.796,-1.346 ; 72.796,-2.14 ccw(c74.431,-2.14) P38.4@73.275,-3.296 ; D45.1@72.796,-1.527 ccw(c75.044,-1.527) P38.4@73.455,-3.116
BY_KC33: D47.1 P38.5 U55.7 U55.8 | length 47.1
  Top Layer w0.254: P38.5@68.821,-4.438 cw(c68.075,-5.456) 69.337,-5.456 ; P38.5@68.971,-4.233 cw(c68.442,-4.955) 69.337,-4.955 cw(c70.233,-4.955) P38.5@69.703,-4.233 ; P38.5@69.337,-3.734 69.337,-5.456 ; P38.5@69.854,-4.438 ccw(c70.6,-5.456) 69.337,-5.456 ; U55.7@73.854,-27.245 ccw(c73.464,-26.855) 74.016,-26.855 ccw(c74.567,-26.855) U55.7@74.177,-27.245 ; U55.8@73.854,-26.298 cw(c73.464,-26.688) 74.016,-26.688 cw(c74.567,-26.688) U55.8@74.177,-26.298 ; U55.8@73.854,-25.975 ccw(c73.648,-25.769) 73.939,-25.769 ; U55.8@73.939,-25.832 73.939,-7.925 72.796,-6.782 70.663,-6.782 69.337,-5.456 ; 73.939,-25.401 ccw(c74.751,-25.401) U55.8@74.177,-25.975 ; U55.7@74.016,-27.407 U55.8@74.016,-26.137
  Bottom Layer w0.254: P38.5@68.72,-3.116 ccw(c67.157,-1.554) D47.1@69.367,-1.554 ; P38.5@68.9,-3.296 ccw(c67.771,-2.167) 69.367,-2.167 ; D47.1@68.942,-1.75 cw(c68.032,-2.343) 69.081,-2.624 ; D47.1@69.008,-1.832 cw(c68.141,-2.7) 69.367,-2.7 cw(c70.594,-2.7) D47.1@69.727,-1.832 ; 69.083,-2.615 cw(c70.199,-2.914) D47.1@69.621,-1.913 ; D47.1@69.113,-1.913 cw(c68.6,-2.803) 69.592,-2.537 ; P38.5@69.367,-3.704 D47.1@69.367,-1.346 ; 69.367,-2.312 ccw(c70.759,-2.312) P38.5@69.775,-3.296 ; D47.1@69.367,-1.699 ccw(c71.373,-1.699) P38.5@69.955,-3.116 ; D47.1@69.476,-2.103 cw(c70.008,-1.961) D47.1@69.57,-1.627 ; 69.61,-2.604 cw(c70.53,-2.357) D47.1@69.772,-1.781
BY_KR1: D24.K P39.1 | length 11.4
  Top Layer w0.254: D24.K@107,-19.671 ccw(c107.446,-19.225) 107.446,-19.856 ; D24.K@107.179,-20.132 cw(c107.846,-20.799) 107.846,-19.856 ; D24.K@107.179,-19.492 ccw(c108.059,-18.612) 108.059,-19.856 ; D24.K@107.231,-19.856 P39.1@110.776,-19.856 ; 108.642,-19.856 ccw(c108.642,-17.685) P39.1@110.177,-19.22 ; 108.732,-19.856 cw(c108.732,-21.9) P39.1@110.177,-20.455 ; 109.255,-19.856 ccw(c109.255,-18.298) P39.1@110.357,-19.4 ; 109.345,-19.856 cw(c109.345,-21.287) P39.1@110.357,-20.275
BY_KR2: D28.K P39.2 | length 10.9
  Top Layer w0.254: D28.K@107.179,-16.671 cw(c107.952,-17.444) 107.952,-16.351 cw(c107.952,-15.257) D28.K@107.179,-16.031 ; D28.K@107.231,-16.351 P39.2@110.781,-16.351 ; 108.655,-16.351 ccw(c108.655,-14.197) P39.2@110.177,-15.72 ; 108.72,-16.351 cw(c108.72,-18.413) P39.2@110.177,-16.955 ; 109.268,-16.351 ccw(c109.268,-14.811) P39.2@110.357,-15.9 ; 109.333,-16.351 cw(c109.333,-17.799) P39.2@110.357,-16.775
BY_KR3: D31.K P39.3 | length 10.9
  Top Layer w0.254: D31.K@107.179,-13.141 cw(c107.952,-13.914) 107.952,-12.82 cw(c107.952,-11.727) D31.K@107.179,-12.5 ; D31.K@107.231,-12.82 P39.3@110.778,-12.82 ; 108.646,-12.82 cw(c108.646,-14.986) P39.3@110.177,-13.455 ; 108.729,-12.82 ccw(c108.729,-10.771) P39.3@110.177,-12.22 ; 109.259,-12.82 cw(c109.259,-14.373) P39.3@110.357,-13.275 ; 109.342,-12.82 ccw(c109.342,-11.384) P39.3@110.357,-12.4
BZ1_KR1: D26.K P40.5 | length 9.9
  Top Layer w0.254: P40.5@101.9,-89.814 103.232,-88.482 ; P40.5@101.95,-89.197 ccw(c102.043,-88.068) 102.845,-88.869 ccw(c103.646,-89.671) P40.5@102.517,-89.764 ; P40.5@101.971,-88.944 ccw(c102.102,-87.352) 103.232,-88.482 ; P40.5@102.77,-89.743 cw(c104.362,-89.612) 103.232,-88.482 ; D26.K@102.912,-86.699 cw(c102.139,-87.472) 103.232,-87.472 cw(c104.326,-87.472) D26.K@103.553,-86.699 ; D26.K@103.232,-86.886 103.232,-88.482
BZ1_KR2: D30.K P40.6 | length 9.5
  Top Layer w0.254: P40.6@105.4,-89.814 106.661,-88.553 D30.K@106.661,-86.886 ; P40.6@105.477,-89.2 ccw(c105.599,-88.224) 106.294,-88.92 ccw(c106.99,-89.615) P40.6@106.014,-89.737 ; P40.6@105.508,-88.948 ccw(c105.681,-87.572) 106.661,-88.553 ccw(c107.642,-89.533) P40.6@106.266,-89.706 ; D30.K@106.341,-86.699 cw(c105.568,-87.472) 106.661,-87.472 cw(c107.755,-87.472) D30.K@106.982,-86.699
BZ2_KR1: D16.K P40.3 | length 8.4
  Top Layer w0.254: D16.K@90.085,-86.445 cw(c89.312,-87.218) 90.405,-87.218 cw(c91.499,-87.218) D16.K@90.726,-86.445 ; D16.K@90.405,-86.632 90.405,-88.043 90.703,-88.341 93.426,-88.341 P40.3@94.9,-89.814
BZ2_KR2: D20.K P40.4 | length 13.4
  Top Layer w0.254: D20.K@93.006,-86.445 cw(c92.233,-87.218) 93.326,-87.218 cw(c94.42,-87.218) D20.K@93.647,-86.445 ; D20.K@93.326,-86.632 93.326,-87.383 94.183,-88.24 97.765,-88.24 ; P40.4@97.772,-89.207 ccw(c97.277,-88.727) 97.765,-88.24 ; 97.947,-88.422 cw(c97.462,-88.907) P40.4@97.955,-89.384 ; 98.13,-88.605 cw(c97.648,-89.087) P40.4@98.137,-89.56 ; 98.312,-88.787 cw(c97.833,-89.266) P40.4@98.32,-89.737 ; P40.4@98.4,-89.814 98.4,-88.875 97.765,-88.24
CAN_H: P36.37 P61.1 | length 29.1
  Bottom Layer w0.254: P36.37@75.133,-11.125 75.514,-11.125 76.429,-10.211 ; P36.37@75.225,-10.768 ccw(c75.457,-9.869) 76.114,-10.525 ; P36.37@75.289,-10.522 ccw(c75.586,-9.369) 76.429,-10.211 ; P36.37@75.756,-11.125 cw(c76.34,-11.125) 75.927,-10.712 ; P61.1@91.117,-4.431 cw(c90.321,-5.486) 91.643,-5.486 ; P61.1@91.27,-4.228 cw(c90.705,-4.976) 91.643,-4.976 cw(c92.581,-4.976) P61.1@92.016,-4.228 ; P61.1@91.643,-3.734 91.643,-5.486 ; P61.1@92.169,-4.431 ccw(c92.966,-5.486) 91.643,-5.486 ; 76.429,-10.211 76.429,-7.518 76.378,-7.468 77.038,-6.807 90.322,-6.807 91.643,-5.486
CAN_L: P36.38 P61.2 | length 22.1
  Bottom Layer w0.254: P36.38@74.816,-8.049 ccw(c74.487,-7.493) 75.133,-7.493 ; P36.38@75.133,-8.585 75.133,-7.493 ; P36.38@75.45,-8.049 cw(c75.779,-7.493) 75.133,-7.493 ; P61.2@87.627,-4.438 cw(c86.882,-5.456) 88.143,-5.456 ; P61.2@87.777,-4.233 cw(c87.249,-4.955) 88.143,-4.955 cw(c89.038,-4.955) P61.2@88.509,-4.233 ; P61.2@88.143,-3.734 88.143,-5.456 ; P61.2@88.659,-4.438 ccw(c89.405,-5.456) 88.143,-5.456 ; 75.133,-7.493 76.352,-6.274 87.325,-6.274 88.143,-5.456
CDH1_KR1: P35.7 P56.8 PR1.4 | length 38.6
  Top Layer w0.254: P56.8@15.36,-91.879 ccw(c14.541,-90.957) 15.773,-90.957 ; P56.8@15.528,-92.069 ccw(c15.044,-91.523) 15.773,-91.523 ccw(c16.503,-91.523) P56.8@16.018,-92.069 ; P56.8@15.773,-92.344 15.773,-90.957 ; P56.8@16.187,-91.879 cw(c17.006,-90.957) 15.773,-90.957 ; P35.7@38.67,-84.618 ccw(c38.514,-84.251) 38.913,-84.251 ; PR1.4@38.744,-79.506 cw(c38.57,-79.68) 38.816,-79.68 cw(c39.061,-79.68) PR1.4@38.888,-79.506 ; PR1.4@38.816,-79.155 38.816,-80.955 40.044,-82.183 40.044,-83.12 38.913,-84.251 ; P35.7@39.156,-84.618 cw(c39.311,-84.251) 38.913,-84.251 ; 15.773,-90.957 17.551,-89.179 34.703,-89.179 38.691,-85.192 P35.7@38.913,-85.192 38.913,-84.251
CDH1_KR2: P35.8 P56.7 PR1.3 | length 44.6
  Top Layer w0.254: P56.7@15.15,-94.884 ccw(c13.646,-94.884) 14.71,-93.821 ccw(c15.773,-92.757) P56.7@15.773,-94.261 ; P56.7@15.404,-94.884 ccw(c14.514,-94.884) 15.143,-94.254 ccw(c15.773,-93.625) P56.7@15.773,-94.515 ; P56.7@15.773,-94.884 14.529,-93.64 14.529,-90.475 16.332,-88.671 34.492,-88.671 37.504,-85.66 37.504,-84.061 P35.8@38.913,-82.652 37.977,-81.716 ; PR1.3@37.906,-79.506 cw(c37.732,-79.68) 37.977,-79.68 cw(c38.223,-79.68) PR1.3@38.049,-79.506 ; PR1.3@37.977,-79.155 37.977,-81.716 ; P35.8@38.293,-82.593 ccw(c37.205,-82.489) 37.978,-81.716 ; P35.8@38.545,-82.617 ccw(c37.901,-82.555) 38.359,-82.098 ccw(c38.816,-81.64) P35.8@38.878,-82.284 ; P35.8@38.854,-82.031 cw(c38.75,-80.944) 37.978,-81.716
CDH1_KR3: P35.5 P56.6 PR1.2 | length 38.3
  Top Layer w0.254: P56.6@12.793,-91.904 ccw(c11.729,-90.84) 13.233,-90.84 ccw(c14.737,-90.84) P56.6@13.674,-91.904 ; P56.6@12.972,-92.083 ccw(c12.343,-91.454) 13.233,-91.454 ccw(c14.124,-91.454) P56.6@13.494,-92.083 ; P56.6@13.233,-92.344 13.233,-90.17 15.24,-88.163 33.586,-88.163 36.373,-85.377 P35.5@36.373,-85.192 36.996,-84.569 36.996,-83.85 37.504,-83.342 37.504,-82.183 37.139,-81.819 PR1.2@37.139,-79.155 ; PR1.2@37.067,-79.506 cw(c36.894,-79.68) 37.139,-79.68 cw(c37.385,-79.68) PR1.2@37.211,-79.506
CDH1_KR4: P35.6 P56.5 PR1.1 | length 41.8
  Top Layer w0.254: P56.5@12.61,-94.884 ccw(c11.106,-94.884) 12.17,-93.821 ccw(c13.233,-92.757) P56.5@13.233,-94.261 ; P56.5@12.864,-94.884 ccw(c11.974,-94.884) 12.603,-94.254 ccw(c13.233,-93.625) P56.5@13.233,-94.515 ; P56.5@13.233,-94.884 11.989,-93.64 11.989,-89.764 14.097,-87.655 33.376,-87.655 35.154,-85.877 35.154,-83.871 P35.6@36.373,-82.652 36.301,-82.58 PR1.1@36.301,-79.155 ; PR1.1@36.229,-79.506 cw(c36.056,-79.68) 36.301,-79.68 cw(c36.546,-79.68) PR1.1@36.373,-79.506
CDH1_KR5: P35.3 P56.4 PR2.4 | length 39.2
  Top Layer w0.254: P56.4@10.253,-91.904 ccw(c9.189,-90.84) 10.693,-90.84 ccw(c12.197,-90.84) P56.4@11.134,-91.904 ; P56.4@10.432,-92.083 ccw(c9.803,-91.454) 10.693,-91.454 ccw(c11.584,-91.454) P56.4@10.954,-92.083 ; P56.4@10.693,-92.344 10.693,-89.51 13.056,-87.147 32.36,-87.147 33.833,-85.674 P35.3@33.833,-85.192 33.833,-84.473 34.964,-83.342 34.964,-82.183 33.736,-80.955 PR2.4@33.736,-79.155 ; PR2.4@33.664,-79.506 cw(c33.49,-79.68) 33.736,-79.68 cw(c33.981,-79.68) PR2.4@33.808,-79.506
CDH1_KR6: P35.4 P56.3 PR2.3 | length 45.7
  Top Layer w0.254: P56.3@10.07,-94.884 ccw(c8.566,-94.884) 9.63,-93.821 ccw(c10.693,-92.757) P56.3@10.693,-94.261 ; P56.3@10.324,-94.884 ccw(c9.434,-94.884) 10.063,-94.254 ccw(c10.693,-93.625) P56.3@10.693,-94.515 ; P56.3@10.693,-94.884 9.449,-93.64 9.449,-89.078 11.887,-86.639 31.979,-86.639 32.614,-86.004 32.614,-83.871 P35.4@33.833,-82.652 32.897,-81.716 ; PR2.3@32.826,-79.506 cw(c32.652,-79.68) 32.897,-79.68 cw(c33.143,-79.68) PR2.3@32.969,-79.506 ; PR2.3@32.897,-79.155 32.897,-81.716 ; P35.4@33.213,-82.593 ccw(c32.125,-82.489) 32.898,-81.716 ; P35.4@33.465,-82.617 ccw(c32.821,-82.555) 33.279,-82.098 ccw(c33.736,-81.64) P35.4@33.798,-82.284 ; P35.4@33.774,-82.031 cw(c33.67,-80.944) 32.898,-81.716
CDH1_KR7: P35.1 P56.2 PR2.2 | length 39.1
  Top Layer w0.254: P56.2@7.713,-91.904 ccw(c6.649,-90.84) 8.153,-90.84 ccw(c9.657,-90.84) P56.2@8.594,-91.904 ; P56.2@7.892,-92.083 ccw(c7.263,-91.454) 8.153,-91.454 ccw(c9.044,-91.454) P56.2@8.414,-92.083 ; P56.2@8.153,-92.344 8.153,-88.595 10.617,-86.131 30.353,-86.131 P35.1@31.293,-85.192 32.059,-84.425 32.059,-83.485 32.424,-83.12 32.424,-82.183 32.059,-81.819 PR2.2@32.059,-79.155 ; PR2.2@31.987,-79.506 cw(c31.814,-79.68) 32.059,-79.68 cw(c32.305,-79.68) PR2.2@32.131,-79.506
CDH1_KR8: P35.2 P56.1 PR2.1 | length 46.1
  Top Layer w0.254: P56.1@7.53,-94.884 ccw(c6.026,-94.884) 7.09,-93.821 ccw(c8.153,-92.757) P56.1@8.153,-94.261 ; P56.1@7.784,-94.884 ccw(c6.894,-94.884) 7.523,-94.254 ccw(c8.153,-93.625) P56.1@8.153,-94.515 ; P56.1@8.153,-94.884 6.782,-93.513 6.782,-88.189 9.347,-85.623 29.439,-85.623 29.947,-85.115 29.947,-83.998 P35.2@31.293,-82.652 ; P35.2@30.67,-82.652 cw(c29.166,-82.652) 30.229,-83.715 cw(c31.293,-84.779) P35.2@31.293,-83.275 ; P35.2@30.924,-82.652 cw(c30.033,-82.652) 30.663,-83.282 cw(c31.293,-83.911) P35.2@31.293,-83.021 ; PR2.1@31.149,-79.506 cw(c30.976,-79.68) 31.221,-79.68 cw(c31.466,-79.68) PR2.1@31.293,-79.506 ; P35.2@31.221,-82.58 PR2.1@31.221,-79.155
CDH2_KR1: P35.15 P57.8 PR3.4 | length 34.2
  Top Layer w0.254: P35.15@48.83,-84.618 ccw(c48.674,-84.251) 49.073,-84.251 ; P35.15@48.851,-85.192 P35.15@49.073,-85.192 49.073,-84.251 ; PR3.4@48.904,-79.506 cw(c48.73,-79.68) 48.976,-79.68 cw(c49.221,-79.68) PR3.4@49.048,-79.506 ; PR3.4@48.976,-79.155 48.976,-80.955 50.204,-82.183 50.204,-83.12 49.073,-84.251 ; P35.15@49.316,-84.618 cw(c49.471,-84.251) 49.073,-84.251
  Bottom Layer w0.254: P57.8@36.373,-92.344 37.836,-90.881 47.574,-90.881 49.073,-89.383 P35.15@49.073,-85.192 ; P57.8@36.373,-91.975 ccw(c36.373,-91.085) 37.003,-91.714 ccw(c37.633,-92.344) P57.8@36.742,-92.344 ; P57.8@36.373,-91.721 ccw(c36.373,-90.217) 37.436,-91.281 ccw(c38.5,-92.344) P57.8@36.996,-92.344 ; P35.15@48.632,-85.632 cw(c47.569,-86.696) 49.073,-86.696 cw(c50.577,-86.696) P35.15@49.513,-85.632 ; P35.15@48.812,-85.453 cw(c48.182,-86.082) 49.073,-86.082 cw(c49.964,-86.082) P35.15@49.334,-85.453
CDH2_KR2: P35.16 P57.7 PR3.3 | length 33.5
  Top Layer w0.254: P57.7@35.75,-94.884 ccw(c34.246,-94.884) 35.309,-93.821 ccw(c36.373,-92.757) P57.7@36.373,-94.261 ; P57.7@36.004,-94.884 ccw(c35.113,-94.884) 35.743,-94.254 ccw(c36.373,-93.625) P57.7@36.373,-94.515 ; P57.7@36.373,-94.884 35.128,-93.64 35.128,-91.542 35.763,-90.907 38.487,-90.907 41.033,-88.361 44.963,-88.361 47.664,-85.66 47.664,-84.061 P35.16@49.073,-82.652 48.137,-81.716 ; PR3.3@48.066,-79.506 cw(c47.892,-79.68) 48.137,-79.68 cw(c48.383,-79.68) PR3.3@48.209,-79.506 ; PR3.3@48.137,-79.155 48.137,-81.716 ; P35.16@48.453,-82.593 ccw(c47.365,-82.489) 48.138,-81.716 ; P35.16@48.705,-82.617 ccw(c48.061,-82.555) 48.519,-82.098 ccw(c48.976,-81.64) P35.16@49.038,-82.284 ; P35.16@49.014,-82.031 cw(c48.91,-80.944) 48.138,-81.716
CDH2_KR3: P35.13 P57.6 PR3.2 | length 31
  Top Layer w0.254: P35.13@46.533,-85.192 47.156,-84.569 47.156,-83.85 47.664,-83.342 47.664,-82.183 47.299,-81.819 PR3.2@47.299,-79.155 ; PR3.2@47.227,-79.506 cw(c47.054,-79.68) 47.299,-79.68 cw(c47.545,-79.68) PR3.2@47.371,-79.506
  Bottom Layer w0.254: P57.6@33.471,-91.837 ccw(c32.971,-91.135) 33.833,-91.135 ; P57.6@33.833,-92.344 33.833,-91.135 ; P57.6@34.194,-91.837 cw(c34.695,-91.135) 33.833,-91.135 ; P35.13@46.092,-85.632 cw(c45.029,-86.696) 46.533,-86.696 cw(c48.037,-86.696) P35.13@46.973,-85.632 ; P35.13@46.272,-85.453 cw(c45.642,-86.082) 46.533,-86.082 cw(c47.424,-86.082) P35.13@46.794,-85.453 ; P35.13@46.533,-85.192 46.533,-89.002 45.06,-90.475 34.493,-90.475 33.833,-91.135
CDH2_KR4: P35.14 P57.5 PR3.1 | length 30.3
  Top Layer w0.254: P57.5@33.21,-94.884 ccw(c31.706,-94.884) 32.769,-93.821 ccw(c33.833,-92.757) P57.5@33.833,-94.261 ; P57.5@33.464,-94.884 ccw(c32.573,-94.884) 33.203,-94.254 ccw(c33.833,-93.625) P57.5@33.833,-94.515 ; P57.5@33.833,-94.884 32.588,-93.64 32.588,-91.237 33.325,-90.5 38.318,-90.5 41.474,-87.345 43.439,-87.345 45.124,-85.66 45.124,-84.061 P35.14@46.533,-82.652 46.461,-82.58 PR3.1@46.461,-79.155 ; PR3.1@46.389,-79.506 cw(c46.216,-79.68) 46.461,-79.68 cw(c46.706,-79.68) PR3.1@46.533,-79.506
CDH2_KR5: P35.11 P57.4 PR4.4 | length 32.1
  Top Layer w0.254: P35.11@43.75,-84.618 ccw(c43.594,-84.251) 43.993,-84.251 ; P35.11@43.771,-85.192 P35.11@43.993,-85.192 43.993,-84.251 ; PR4.4@43.824,-79.506 cw(c43.65,-79.68) 43.896,-79.68 cw(c44.141,-79.68) PR4.4@43.968,-79.506 ; PR4.4@43.896,-79.155 43.896,-80.955 45.124,-82.183 45.124,-83.12 43.993,-84.251 ; P35.11@44.236,-84.618 cw(c44.391,-84.251) 43.993,-84.251
  Bottom Layer w0.254: P57.4@30.959,-91.818 ccw(c30.574,-91.211) 31.293,-91.211 ; P57.4@31.293,-92.344 31.293,-91.211 ; P57.4@31.627,-91.818 cw(c32.011,-91.211) 31.293,-91.211 ; P35.11@43.552,-85.632 cw(c42.489,-86.696) 43.993,-86.696 cw(c45.497,-86.696) P35.11@44.433,-85.632 ; P35.11@43.732,-85.453 cw(c43.102,-86.082) 43.993,-86.082 cw(c44.884,-86.082) P35.11@44.254,-85.453 ; P35.11@43.993,-85.192 43.993,-88.646 42.57,-90.068 32.436,-90.068 31.293,-91.211
CDH2_KR6: P35.12 P57.3 PR4.3 | length 33.8
  Top Layer w0.254: P57.3@30.67,-94.884 ccw(c29.166,-94.884) 30.229,-93.821 ccw(c31.293,-92.757) P57.3@31.293,-94.261 ; P57.3@30.924,-94.884 ccw(c30.033,-94.884) 30.663,-94.254 ccw(c31.293,-93.625) P57.3@31.293,-94.515 ; P57.3@31.293,-94.884 30.099,-93.691 30.099,-90.957 30.963,-90.094 38.15,-90.094 42.584,-85.66 42.584,-84.061 P35.12@43.993,-82.652 43.057,-81.716 ; PR4.3@42.986,-79.506 cw(c42.812,-79.68) 43.057,-79.68 cw(c43.303,-79.68) PR4.3@43.129,-79.506 ; PR4.3@43.057,-79.155 43.057,-81.716 ; P35.12@43.373,-82.593 ccw(c42.285,-82.489) 43.058,-81.716 ; P35.12@43.625,-82.617 ccw(c42.981,-82.555) 43.439,-82.098 ccw(c43.896,-81.64) P35.12@43.958,-82.284 ; P35.12@43.934,-82.031 cw(c43.83,-80.944) 43.058,-81.716
CDH2_KR7: P35.9 P57.2 PR4.2 | length 32.7
  Top Layer w0.254: P35.9@41.453,-85.192 42.076,-84.569 42.076,-83.85 42.584,-83.342 42.584,-82.183 42.219,-81.819 PR4.2@42.219,-79.155 ; PR4.2@42.147,-79.506 cw(c41.974,-79.68) 42.219,-79.68 cw(c42.465,-79.68) PR4.2@42.291,-79.506
  Bottom Layer w0.254: P57.2@28.316,-91.901 ccw(c27.286,-90.856) 28.753,-90.856 ; P57.2@28.494,-92.082 ccw(c27.884,-91.463) 28.753,-91.463 ccw(c29.622,-91.463) P57.2@29.012,-92.082 ; P57.2@28.753,-92.344 28.753,-90.856 ; P57.2@29.19,-91.901 cw(c30.22,-90.856) 28.753,-90.856 ; P35.9@41.012,-85.632 cw(c39.949,-86.696) 41.453,-86.696 cw(c42.957,-86.696) P35.9@41.893,-85.632 ; P35.9@41.192,-85.453 cw(c40.562,-86.082) 41.453,-86.082 cw(c42.344,-86.082) P35.9@41.714,-85.453 ; P35.9@41.453,-85.192 41.453,-88.087 39.878,-89.662 29.947,-89.662 28.753,-90.856
CDH2_KR8: P35.10 P57.1 PR4.1 | length 30.7
  Top Layer w0.254: P57.1@28.13,-94.884 ccw(c26.626,-94.884) 27.689,-93.821 ccw(c28.753,-92.757) P57.1@28.753,-94.261 ; P57.1@28.384,-94.884 ccw(c27.493,-94.884) 28.123,-94.254 ccw(c28.753,-93.625) P57.1@28.753,-94.515 ; P57.1@28.753,-94.884 27.381,-93.513 27.381,-90.653 28.346,-89.687 36.016,-89.687 40.044,-85.66 40.044,-84.061 P35.10@41.453,-82.652 ; PR4.1@41.309,-79.506 cw(c41.136,-79.68) 41.381,-79.68 cw(c41.626,-79.68) PR4.1@41.453,-79.506 ; P35.10@41.381,-82.58 PR4.1@41.381,-79.155
CDH3_KR1: P35.23 P58.8 PR5.4 | length 19.2
  Top Layer w0.254: P58.8@56.582,-91.904 ccw(c55.519,-90.84) 57.023,-90.84 ccw(c58.527,-90.84) P58.8@57.464,-91.904 ; P58.8@56.762,-92.083 ccw(c56.132,-91.454) 57.023,-91.454 ccw(c57.914,-91.454) P58.8@57.284,-92.083 ; P58.8@57.023,-92.344 57.023,-87.401 P35.23@59.233,-85.192 60.046,-84.379 60.046,-83.66 60.364,-83.342 60.364,-82.183 59.136,-80.955 PR5.4@59.136,-79.155 ; PR5.4@59.064,-79.506 cw(c58.89,-79.68) 59.136,-79.68 cw(c59.381,-79.68) PR5.4@59.208,-79.506
CDH3_KR2: P35.24 P58.7 PR5.3 | length 26.2
  Top Layer w0.254: P58.7@56.4,-94.884 ccw(c54.896,-94.884) 55.959,-93.821 ccw(c57.023,-92.757) P58.7@57.023,-94.261 ; P58.7@56.654,-94.884 ccw(c55.763,-94.884) 56.393,-94.254 ccw(c57.023,-93.625) P58.7@57.023,-94.515 ; P58.7@57.023,-94.884 55.778,-93.64 55.778,-87.705 57.824,-85.66 57.824,-85.001 59.233,-83.592 ; PR5.3@58.226,-79.506 cw(c58.052,-79.68) 58.297,-79.68 cw(c58.543,-79.68) PR5.3@58.369,-79.506 ; PR5.3@58.297,-79.155 58.297,-81.716 ; P35.24@58.613,-82.593 ccw(c57.525,-82.489) 58.298,-81.716 ; P35.24@58.865,-82.617 ccw(c58.221,-82.555) 58.679,-82.098 ccw(c59.136,-81.64) P35.24@59.198,-82.284 ; P35.24@58.99,-83.225 cw(c58.834,-83.592) 59.233,-83.592 ; P35.24@59.174,-82.031 cw(c59.07,-80.944) 58.298,-81.716 ; P35.24@59.476,-83.225 ccw(c59.631,-83.592) 59.233,-83.592 ; 58.297,-81.716 P35.24@59.233,-82.652 59.233,-83.592
CDH3_KR3: P35.21 P58.6 PR5.2 | length 18.9
  Top Layer w0.254: P58.6@54.042,-91.904 ccw(c52.979,-90.84) 54.483,-90.84 ccw(c55.987,-90.84) P58.6@54.924,-91.904 ; P58.6@54.222,-92.083 ccw(c53.592,-91.454) 54.483,-91.454 ccw(c55.374,-91.454) P58.6@54.744,-92.083 ; P58.6@54.483,-92.344 54.483,-87.401 P35.21@56.693,-85.192 57.824,-84.061 57.824,-82.183 57.459,-81.819 PR5.2@57.459,-79.155 ; PR5.2@57.387,-79.506 cw(c57.214,-79.68) 57.459,-79.68 cw(c57.705,-79.68) PR5.2@57.531,-79.506
CDH3_KR4: P35.22 P58.5 PR5.1 | length 22.7
  Top Layer w0.254: P58.5@53.86,-94.884 ccw(c52.356,-94.884) 53.419,-93.821 ccw(c54.483,-92.757) P58.5@54.483,-94.261 ; P58.5@54.114,-94.884 ccw(c53.223,-94.884) 53.853,-94.254 ccw(c54.483,-93.625) P58.5@54.483,-94.515 ; P58.5@54.483,-94.884 53.34,-93.741 53.34,-87.604 55.284,-85.66 55.284,-85.001 56.693,-83.592 ; P35.22@56.45,-83.225 cw(c56.294,-83.592) 56.693,-83.592 ; PR5.1@56.549,-79.506 cw(c56.376,-79.68) 56.621,-79.68 cw(c56.866,-79.68) PR5.1@56.693,-79.506 ; PR5.1@56.621,-79.155 56.621,-82.58 P35.22@56.693,-82.652 56.693,-83.592 ; P35.22@56.936,-83.225 ccw(c57.091,-83.592) 56.693,-83.592
CDH3_KR5: P35.19 P58.4 PR6.4 | length 19.2
  Top Layer w0.254: P58.4@51.502,-91.904 ccw(c50.439,-90.84) 51.943,-90.84 ccw(c53.447,-90.84) P58.4@52.384,-91.904 ; P58.4@51.682,-92.083 ccw(c51.052,-91.454) 51.943,-91.454 ccw(c52.834,-91.454) P58.4@52.204,-92.083 ; P58.4@51.943,-92.344 51.943,-87.401 P35.19@54.153,-85.192 55.284,-84.061 55.284,-82.183 54.183,-81.082 PR6.4@54.183,-79.155 ; PR6.4@54.111,-79.506 cw(c53.937,-79.68) 54.183,-79.68 cw(c54.428,-79.68) PR6.4@54.255,-79.506
CDH3_KR6: P35.20 P58.3 PR6.3 | length 23.6
  Top Layer w0.254: P58.3@51.32,-94.884 ccw(c49.816,-94.884) 50.879,-93.821 ccw(c51.943,-92.757) P58.3@51.943,-94.261 ; P58.3@51.574,-94.884 ccw(c50.683,-94.884) 51.313,-94.254 ccw(c51.943,-93.625) P58.3@51.943,-94.515 ; P58.3@51.943,-94.884 50.724,-93.665 50.724,-87.68 52.744,-85.66 52.744,-84.061 P35.20@54.153,-82.652 53.344,-81.843 ; PR6.3@53.273,-79.506 cw(c53.099,-79.68) 53.344,-79.68 cw(c53.59,-79.68) PR6.3@53.416,-79.506 ; PR6.3@53.344,-79.155 53.344,-81.843 ; P35.20@53.544,-82.52 ccw(c52.823,-82.365) 53.344,-81.843 ; P35.20@54.021,-82.043 cw(c53.866,-81.322) 53.344,-81.843
CDH3_KR7: P35.17 P58.2 PR6.2 | length 18.8
  Top Layer w0.254: P58.2@48.962,-91.904 ccw(c47.899,-90.84) 49.403,-90.84 ccw(c50.907,-90.84) P58.2@49.844,-91.904 ; P58.2@49.142,-92.083 ccw(c48.512,-91.454) 49.403,-91.454 ccw(c50.294,-91.454) P58.2@49.664,-92.083 ; P58.2@49.403,-92.344 49.403,-87.401 P35.17@51.613,-85.192 52.236,-84.569 52.236,-83.85 52.744,-83.342 52.744,-82.183 52.506,-81.946 PR6.2@52.506,-79.155 ; PR6.2@52.434,-79.506 cw(c52.261,-79.68) 52.506,-79.68 cw(c52.752,-79.68) PR6.2@52.578,-79.506
CDH3_KR8: P35.18 P58.1 PR6.1 | length 22
  Top Layer w0.254: P58.1@48.78,-94.884 ccw(c47.276,-94.884) 48.339,-93.821 ccw(c49.403,-92.757) P58.1@49.403,-94.261 ; P58.1@49.034,-94.884 ccw(c48.143,-94.884) 48.773,-94.254 ccw(c49.403,-93.625) P58.1@49.403,-94.515 ; P58.1@49.403,-94.884 47.93,-93.411 47.93,-87.934 50.204,-85.66 50.204,-84.061 P35.18@51.613,-82.652 51.668,-82.596 PR6.1@51.668,-79.155 ; PR6.1@51.596,-79.506 cw(c51.423,-79.68) 51.668,-79.68 cw(c51.913,-79.68) PR6.1@51.74,-79.506
CDH4_KR1: P35.31 P59.8 PR7.4 | length 31.7
  Top Layer w0.254: P35.31@68.99,-85.667 cw(c68.25,-86.538) 69.393,-86.538 ; P35.31@69.154,-85.473 cw(c68.716,-85.989) 69.393,-85.989 cw(c70.07,-85.989) P35.31@69.632,-85.473 ; PR7.4@69.351,-79.506 cw(c69.177,-79.68) 69.423,-79.68 cw(c69.668,-79.68) PR7.4@69.495,-79.506 ; P35.31@69.393,-84.823 ccw(c69.393,-83.932) 70.023,-84.562 ccw(c70.653,-85.192) P35.31@69.762,-85.192 ; P35.31@69.393,-84.569 ccw(c69.393,-83.065) 70.456,-84.128 ccw(c71.52,-85.192) P35.31@70.016,-85.192 ; PR7.4@69.423,-79.155 69.423,-81.082 70.524,-82.183 70.524,-84.061 P35.31@69.393,-85.192 69.393,-86.538 ; P35.31@69.796,-85.667 ccw(c70.536,-86.538) 69.393,-86.538 ; P59.8@77.309,-91.904 ccw(c76.245,-90.84) 77.749,-90.84 ccw(c79.253,-90.84) P59.8@78.19,-91.904 ; P59.8@77.488,-92.083 ccw(c76.859,-91.454) 77.749,-91.454 ccw(c78.64,-91.454) P59.8@78.01,-92.083 ; P59.8@77.749,-92.344 77.749,-89.637 75.108,-86.995 69.85,-86.995 69.393,-86.538
CDH4_KR2: P35.32 P59.7 PR7.3 | length 29.9
  Top Layer w0.254: PR7.3@68.513,-79.506 cw(c68.339,-79.68) 68.584,-79.68 cw(c68.83,-79.68) PR7.3@68.656,-79.506 ; PR7.3@68.584,-79.155 68.584,-81.843 ; P35.32@68.784,-82.52 ccw(c68.063,-82.365) 68.584,-81.843 ; P35.32@69.15,-83.225 cw(c68.994,-83.592) 69.393,-83.592 ; P35.32@69.261,-82.043 cw(c69.106,-81.322) 68.584,-81.843 ; P35.32@69.636,-83.225 ccw(c69.791,-83.592) 69.393,-83.592 ; P59.7@77.126,-94.884 ccw(c75.622,-94.884) 76.686,-93.821 ccw(c77.749,-92.757) P59.7@77.749,-94.261 ; P59.7@77.38,-94.884 ccw(c76.49,-94.884) 77.119,-94.254 ccw(c77.749,-93.625) P59.7@77.749,-94.515 ; P59.7@77.749,-94.884 76.505,-93.64 76.505,-90.145 74.092,-87.732 69.139,-87.732 68.262,-86.855 68.262,-84.723 69.393,-83.592 ; 68.584,-81.843 P35.32@69.393,-82.652 69.393,-83.592
CDH4_KR3: P35.29 P59.6 PR7.2 | length 28.2
  Top Layer w0.254: P35.29@66.412,-85.632 cw(c65.349,-86.696) 66.853,-86.696 cw(c68.357,-86.696) P35.29@67.293,-85.632 ; P35.29@66.592,-85.453 cw(c65.962,-86.082) 66.853,-86.082 cw(c67.744,-86.082) P35.29@67.114,-85.453 ; PR7.2@67.674,-79.506 cw(c67.501,-79.68) 67.746,-79.68 cw(c67.992,-79.68) PR7.2@67.818,-79.506 ; PR7.2@67.746,-79.155 67.746,-81.946 67.984,-82.183 67.984,-84.061 P35.29@66.853,-85.192 66.853,-87.198 68.199,-88.544 73.406,-88.544 75.209,-90.348 P59.6@75.209,-92.344 ; P59.6@74.769,-91.904 ccw(c73.705,-90.84) 75.209,-90.84 ccw(c76.713,-90.84) P59.6@75.65,-91.904 ; P59.6@74.948,-92.083 ccw(c74.319,-91.454) 75.209,-91.454 ccw(c76.1,-91.454) P59.6@75.47,-92.083